# EAGLE board mhd_test_brd (EAGLE 5.10)
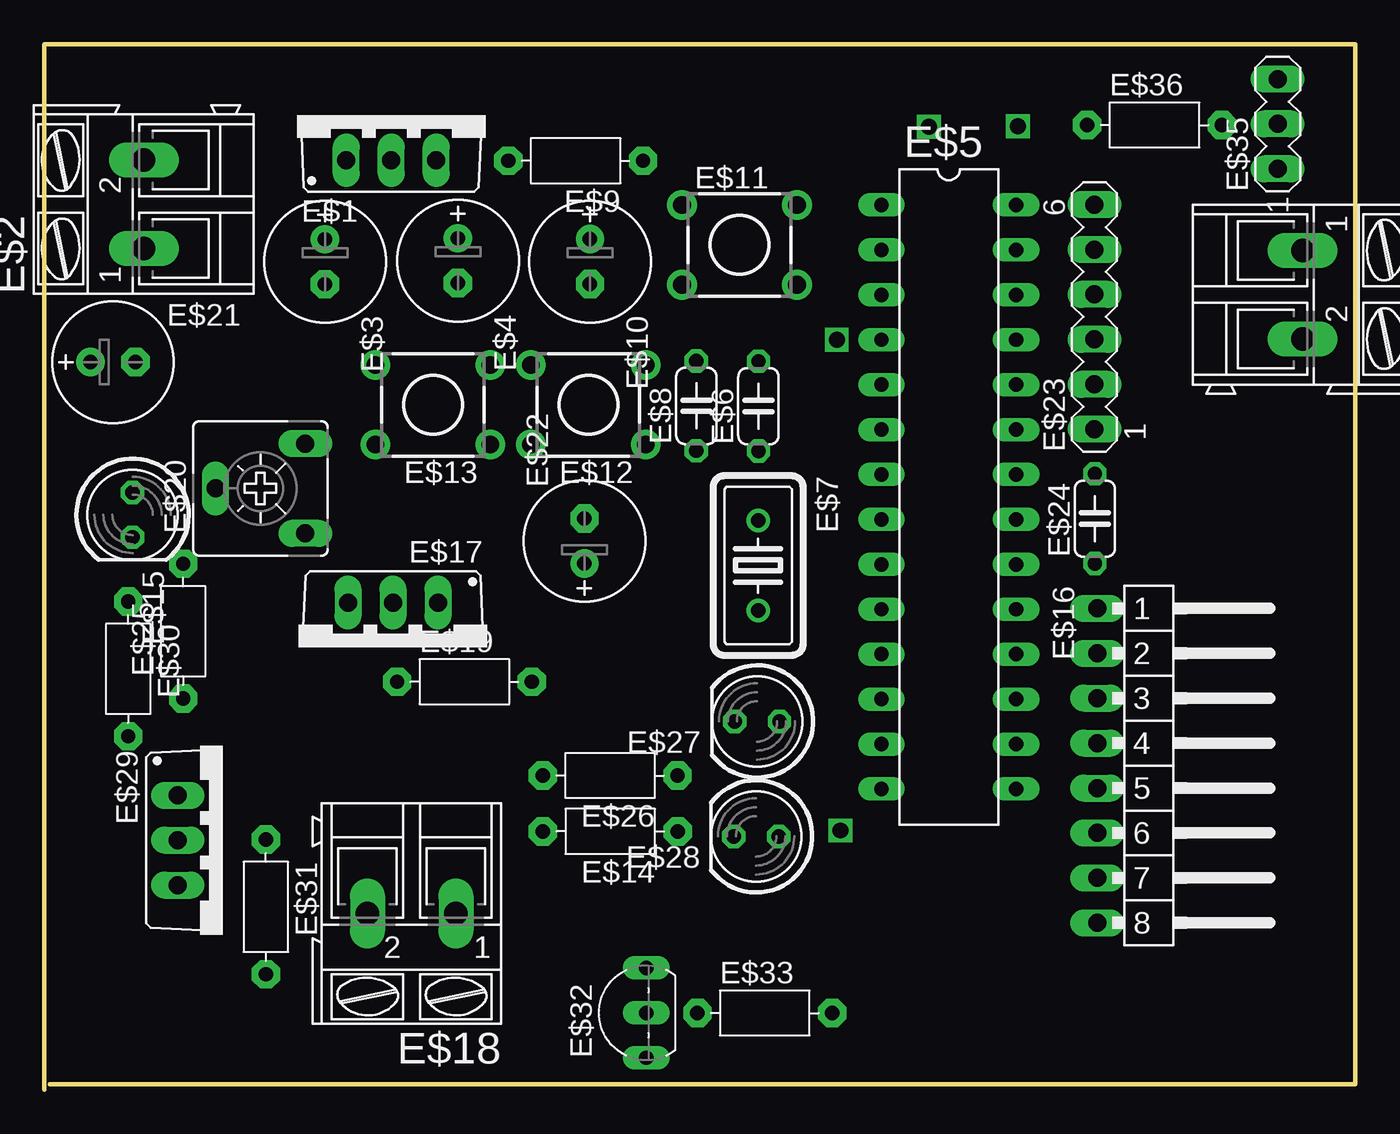
[diagram p0: board, top side]
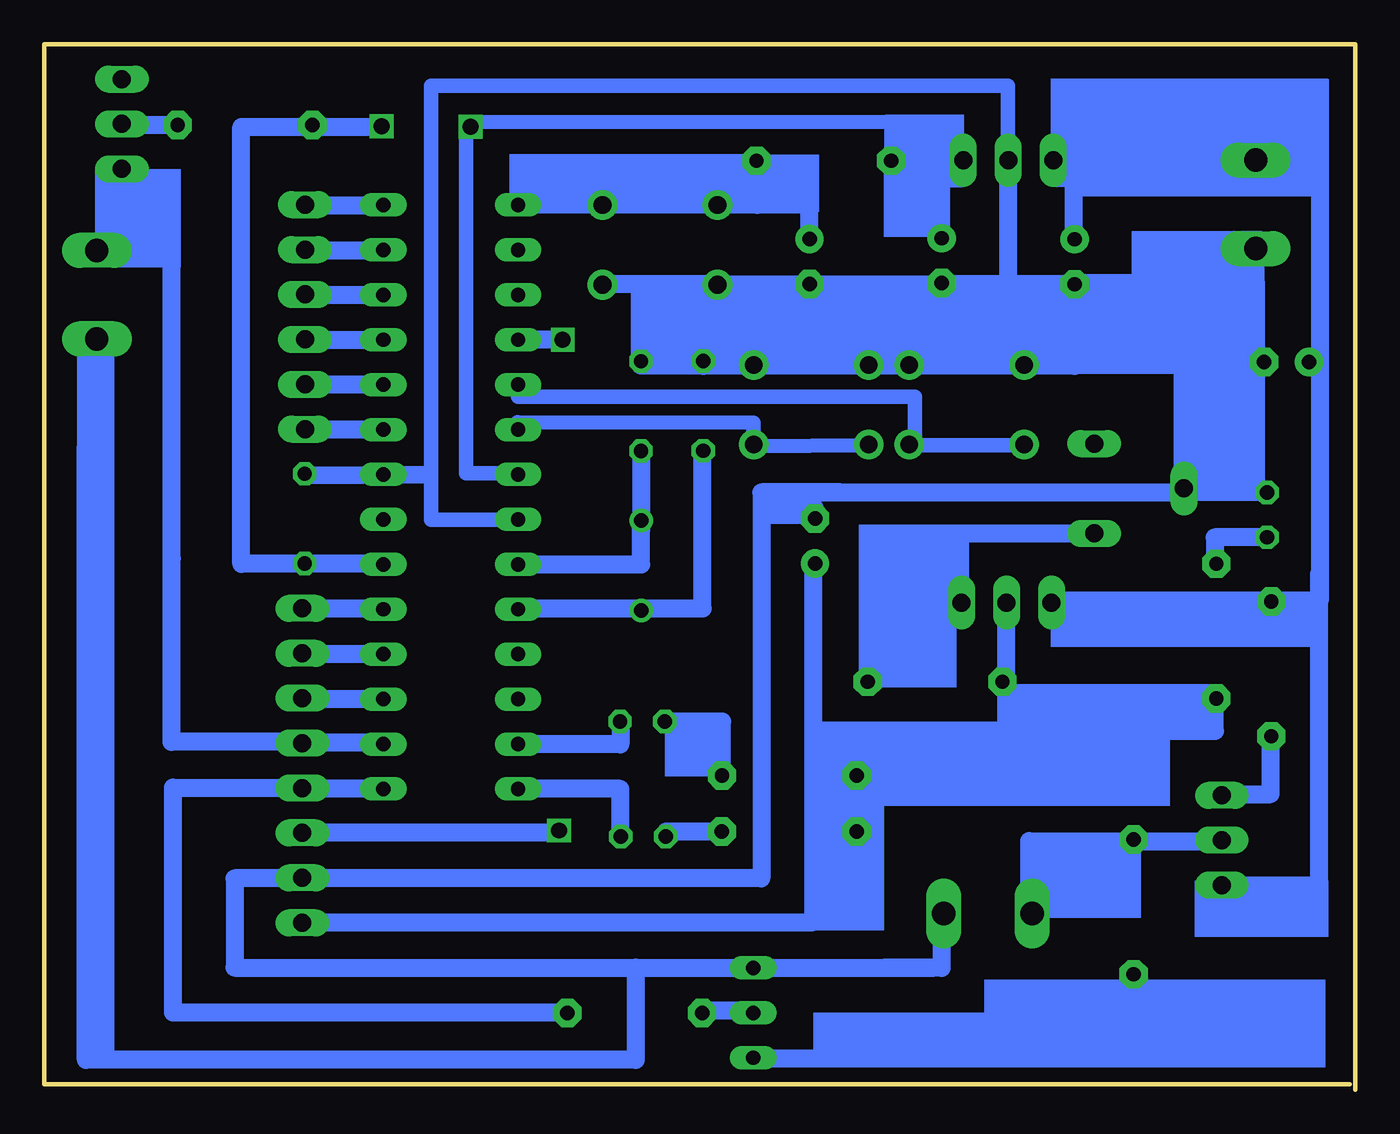
[diagram p1: board, bottom side, seen from below]

Size 74.15 x 59.12 mm. Coordinates in mm from the lower left corner, seen from the top.
Outline: 0,0 0,59.12 74.15,59.12 74.15,0.3 0.3,0.3
Copper layers (1*16): Top 0.035mm / dielectric 1.5mm / Bottom 0.035mm
Design rules "default": minimum track width 10mil, minimum drill 24mil, track to track 8mil, track to pad 8mil, pad to pad 8mil, via to via 8mil, smd to smd 8mil, copper to edge 40mil, drill to drill 8mil, minimum pad ring 10mil, minimum via ring 8mil, stop-mask expansion 4mil, vias tented up to drill 0mil, thermal gap 10mil

## Footprints (pad centres in the part's own frame; a part is rotated, then mirrored left to right if it is on the bottom)
TO220V = drill 1.016 long: 1 -2.54,-2.54; 2 0,-2.54; 3 2.54,-2.54
AK300/2 = drill 1.321 long: 1 -2.515,0; 2 2.489,0
E2,5-7 = drill 0.813 pad 1.6 round: + -1.27,0 | drill 0.813 pad 1.6 octagon: - 1.27,0
DIL28-3 = drill 0.813 long: 1 -16.51,-3.81; 2 -13.97,-3.81; 3 -11.43,-3.81; 4 -8.89,-3.81; 5 -6.35,-3.81; 6 -3.81,-3.81; 7 -1.27,-3.81; 8 1.27,-3.81; 9 3.81,-3.81; 10 6.35,-3.81; 11 8.89,-3.81; 12 11.43,-3.81; 13 13.97,-3.81; 14 16.51,-3.81; 15 16.51,3.81; 16 13.97,3.81; 17 11.43,3.81; 18 8.89,3.81; 19 6.35,3.81; 20 3.81,3.81; 21 1.27,3.81; 22 -1.27,3.81; 23 -3.81,3.81; 24 -6.35,3.81; 25 -8.89,3.81; 26 -11.43,3.81; 27 -13.97,3.81; 28 -16.51,3.81
C050-024X044 = drill 0.813 octagon: 1 -2.54,0; 2 2.54,0
HC18U-V = drill 0.813 round: 1 -2.54,0; 2 2.54,0
R-7,5 = drill 0.813 pad 1.6 octagon: 1 -3.81,0; 2 3.81,0
TL1105 = drill 1 pad 1.676 round: 1 -2.25,3.25; 2 2.25,3.25; 3 -2.25,-3.25; 4 2.25,-3.25
LED5MM = drill 0.813 octagon: A -1.27,0; K 1.27,0
MA08-1W = drill 1.016 long: 1 -8.89,0; 2 -6.35,0; 3 -3.81,0; 4 -1.27,0; 5 1.27,0; 6 3.81,0; 7 6.35,0; 8 8.89,0
CA6V = drill 1.016 long: A -2.54,-2.54; E 2.54,-2.54; S 0,2.54
MA06-1 = drill 1.016 long: 1 -6.35,0; 2 -3.81,0; 3 -1.27,0; 4 1.27,0; 5 3.81,0; 6 6.35,0
TO92- = drill 0.813 long: 1 2.54,0; 2 0,0; 3 -2.54,0
MA03-1 = drill 1.016 long: 1 -2.54,0; 2 0,0; 3 2.54,0

## Placement (x,y rotation side)
E$1  [TO220V]  19.63,55.1 0 top
E$2  [AK300/2]  5.63,50.08 90 top
E$3  [E2,5-7]  15.88,46.82 270 top
E$4  [E2,5-7]  23.4,46.88 270 top
E$5  [DIL28-3]  51.17,33.52 270 top
E$6  [C050-024X044]  40.4,38.65 90 top
E$7  [HC18U-V]  40.38,29.64 270 top
E$8  [C050-024X044]  36.89,38.67 90 top
E$9  [R-7,5]  30.06,52.53 180 top
E$10  [E2,5-7]  30.87,46.83 270 top
E$11  [TL1105]  39.33,47.77 270 top
E$12  [TL1105]  30.78,38.73 90 top
E$13  [TL1105]  21.99,38.73 90 top
E$14  [R-7,5]  32.02,14.61 180 top
E$15  [LED5MM]  5,32.51 270 top
E$16  [MA08-1W]  59.56,18.33 270 top
E$17  [TO220V]  19.73,25.01 180 top
E$18  [AK300/2]  20.77,9.97 180 top
E$19  [R-7,5]  23.77,23.07 0 top
E$20  [CA6V]  12.23,34 90 top
E$21  [E2,5-7]  3.89,41.15 0 top
E$22  [E2,5-7]  30.56,31.03 90 top
E$23  [MA06-1]  59.41,43.7 90 top
E$24  [C050-024X044]  59.43,32.29 90 top
E$25  [R-7,5]  7.86,25.93 90 top
E$26  [R-7,5]  32.01,17.77 180 top
E$27  [LED5MM]  40.32,20.83 180 top
E$28  [LED5MM]  40.27,14.33 180 top
E$29  [TO220V]  10.09,14.11 270 top
E$30  [R-7,5]  4.75,23.8 270 top
E$31  [R-7,5]  12.54,10.34 270 top
E$32  [TO92-]  34.05,4.35 90 top
E$33  [R-7,5]  40.76,4.34 0 top
E$34  [AK300/2]  71.19,44.95 270 top
E$35  [MA03-1]  69.77,54.61 90 top
E$36  [R-7,5]  62.8,54.55 0 top

## Library data of the parts
E$1 E$17 E$29 = transistor-pnp
E$2 E$18 E$34 = con-ptr500
E$3 E$4 E$6 E$8 E$10 E$21 E$22 E$24 = rcl
E$5 = atmel
E$7 = crystal
E$9 E$14 E$19 E$25 E$26 E$30 E$31 E$33 E$36 = discrete
E$11-E$13 = switch
E$15 E$27 E$28 = led
E$16 E$23 E$35 = con-lstb
E$20 = pot
E$32 = ref-packages

## Nets
S$56: E$36.2

## Tracks (layer width: path | path; a pad name or v marks a point on that pad's centre or on a via)
S$1
  Bottom 1.016: 15.9,45.54 23.45,45.54
S$2
  Bottom 1.016: 19.61,45.54 19.61,52.67
S$3
  Bottom 1.016: 15.92,48.12 15.92,52.58 17.15,52.58
S$4
  Bottom 1.016: 23.4,48.17 23.4,52.58 22.15,52.58
S$5
  Bottom 1.016: 5.62,52.44 5.62,52.59 17.1,52.59
S$6
  Bottom 1.016: 15.88,45.6 15.89,45.6 | 15.88,45.6 5.63,45.6 5.63,47.61 | 15.88,45.6 15.88,40.93 36.89,40.93 36.89,41.25
S$7
  Bottom 1.016: 23.42,45.57 23.42,45.53 36.15,45.53
S$8
  Bottom 1.016: 30.88,48.08 30.88,50.03 33.82,50.03 | 33.82,50.03 33.82,52.58 | 33.82,50.03 42.6,50.03
S$9
  Bottom 1.016: 22.12,52.62 22.12,52.58 26.14,52.58
S$10
  Bottom 1.016: 42.57,50.09 42.57,50.03 47.3,50.03
S$11
  Bottom 1.016: 40.59,27.19 47.35,27.19
S$12
  Bottom 1.016: 47.39,29.69 40.39,29.69 40.39,32.11
S$13
  Bottom 1.016: 40.38,31.64 40.38,36.08
S$14
  Bottom 1.016: 36.05,45.54 36.06,45.54 40.42,41.18
S$15
  Bottom 1.016: 36.92,41.22 36.92,44.56
S$16
  Bottom 1.016: 40.69,27.2 36.92,27.2 36.92,36.2
S$17
  Bottom 1.016: 36.02,45.54 42.58,45.54
S$18
  Bottom 0.813: 26.25,52.63 26.25,54.74 50.31,54.72 50.31,34.86 47.28,34.86
S$19
  Bottom 0.813: 19.66,52.54 19.66,56.76 52.29,56.76 52.29,32.22 47.35,32.22
S$20
  Bottom 1.016: 36.5,40.94 40.42,40.94
S$21
  Bottom 0.813: 47.39,37.38 47.39,37.74 34.05,37.71 34.05,36.4 27.53,36.43
S$22
  Bottom 0.813: 47.37,40 47.37,39.2 24.92,39.2 24.92,36.43 18.74,36.43
S$23
  Bottom 0.813: 9.8,45.65 9.77,45.65
S$24
  Bottom 1.016: 22.34,27.49 22.34,31.46 15.38,31.46
S$25  (via drill 0.9)
  other vias: 50.04,54.45
S$26  (via drill 0.9)
  other vias: 55.08,54.49
S$27
  Bottom 1.016: 59.57,14.56 45,14.56 45,14.69
S$28  (via drill 0.9)
  other vias: 45.03,14.66
S$29
  Bottom 1.016: 5.66,52.42 2.02,52.42 2.02,27.64 17.17,27.64
S$30
  Bottom 1.016: 19.77,27.56 19.77,22.79 20.07,22.79
S$31  (via drill 0.9)
  Bottom 1.016: v44.83,42.4 47.33,42.4 47.33,42.38
S$32
  Bottom 1.016: 27.56,22.79 27.56,27.56 22.22,27.56
S$33
  Bottom 1.016: 9.75,34.1 9.75,45.59 9.71,45.59
S$34
  Bottom 1.016: 55.05,50.05 55.05,50 59.49,50 | 55,47.44 59.44,47.44 | 54.96,44.93 59.4,44.93 | 54.96,42.38 59.4,42.38 | 55.09,39.87 59.53,39.87 | 54.96,37.32 59.4,37.32 | 55.06,27.19 59.5,27.19 | 55.13,24.62 59.57,24.62 | 55.02,22.09 59.46,22.09 | 55.09,19.62 59.53,19.62 | 55.02,17.02 59.46,17.02
S$35
  Bottom 1.016: 30.59,32.9 31.44,33.78 9.71,33.8
S$36
  Bottom 1.016: 5.21,41.15 9.71,41.15 | 5.36,33.78 9.86,33.78
S$37
  Bottom 1.016: 59.54,34.75 52.57,34.79 | 59.39,29.77 54.77,29.77
S$38
  Bottom 1.016: 59.51,29.73 63.01,29.73 63.01,54.45 55.06,54.45
S$39
  Bottom 1.016: 29.1,33.78 33.6,33.78 33.6,11.96 59.58,11.96
S$40
  Bottom 1.016: 59.58,9.48 30.65,9.48 30.65,20.32 | 30.65,20.32 30.65,29.88 | 19.76,23.61 19.76,20.29 30.65,20.32
S$41
  Bottom 1.016: 4.99,31.23 7.96,31.23 7.96,29.84
S$42
  Bottom 1.016: 20.57,20.3 7.94,20.3 7.94,22.09
S$43
  Bottom 1.016: 41.57,14.29 41.57,17.02 47.51,17.02
S$44
  Bottom 1.016: 41.57,20.76 41.57,19.53 47.47,19.53
S$45
  Bottom 1.016: 35.81,17.86 35.81,20.81 39.07,20.81
S$46
  Bottom 1.016: 35.85,14.6 38.98,14.6 38.98,14.38
S$47
  Bottom 1.016: 2.05,29.16 2.05,11.57 7.73,11.57
S$48
  Bottom 1.016: 7.54,16.71 4.79,16.71 4.79,20.05
S$49
  Bottom 1.016: 59.55,11.95 63.4,11.95 63.4,6.9 40.71,6.9 | 40.71,6.9 23.8,6.9 | 40.71,6.9 40.71,1.69 71.81,1.69 71.81,36.38
S$50
  Bottom 1.016: 23.4,10.69 23.4,6.89 26.7,6.89
S$51
  Bottom 1.016: 18.44,10.7 18.44,14.06 7.42,14.06
S$52
  Bottom 1.016: 12.48,6.61 12.48,1.76 34.11,1.76
S$53
  Bottom 1.016: 34.05,4.46 37,4.46 37,4.41
S$54
  Bottom 1.016: 44.5,4.36 66.87,4.36 66.87,17.08 59.23,17.08
S$55
  Bottom 1.016: 69.71,42.4 71.82,42.4 71.82,35.4
S$56
  Bottom 1.016: E$36.2 69.83,54.55 69.83,54.61
S$57
  Bottom 1.016: 59.41,19.67 66.96,19.67 66.96,31.16
S$58
  Bottom 1.016: 69.74,47.36 69.74,52.13 | 69.74,47.36 70.66,47.36 | 69.74,47.36 66.95,47.36 66.95,30.05
(copper drawn outside any net)
  shapes: Bottom area x33